# Altium PCB RedBaron v2.PcbDoc
Units mm, origin at the board's own origin, x right, y up, seen from the top; angles counter-clockwise.
Board outline 102 x 85 mm, 4 copper layers (Sig Top, GND Top, GND Bot, Sig Bot), stack 1.586 mm thick; 44 components, 81 nets, 398 pads, 0 vias.
Unrouted connection lines stored in the file: 183.
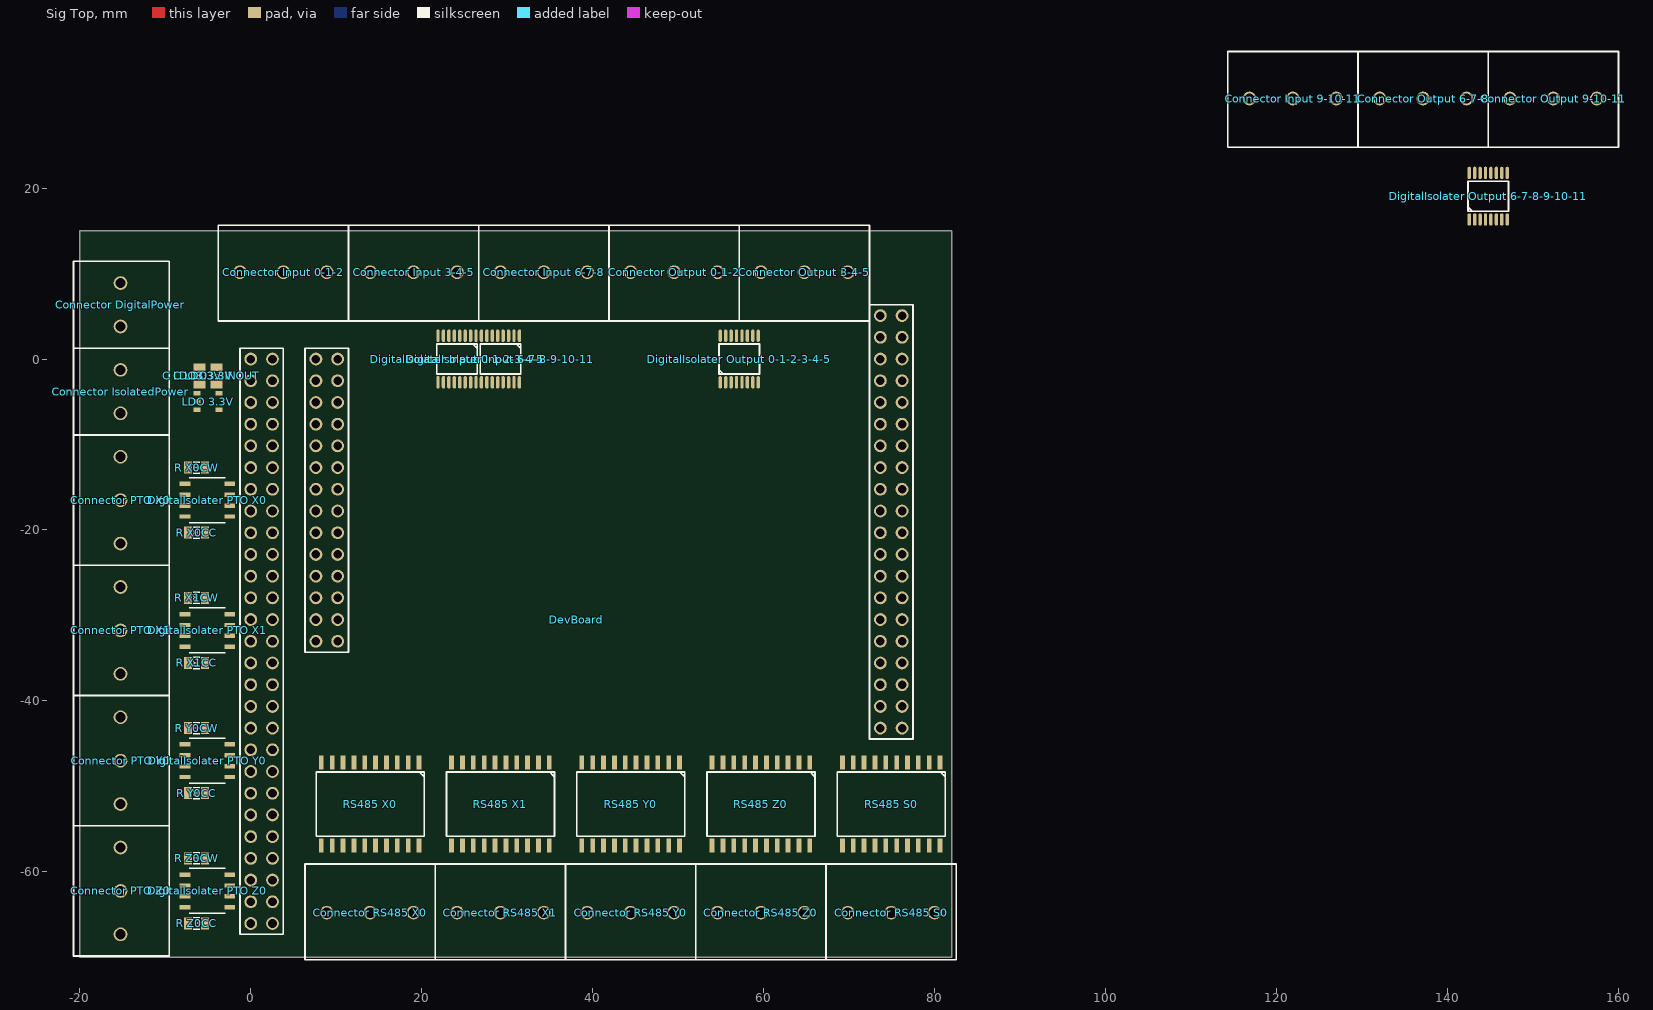
[diagram p0: Sig Top view]
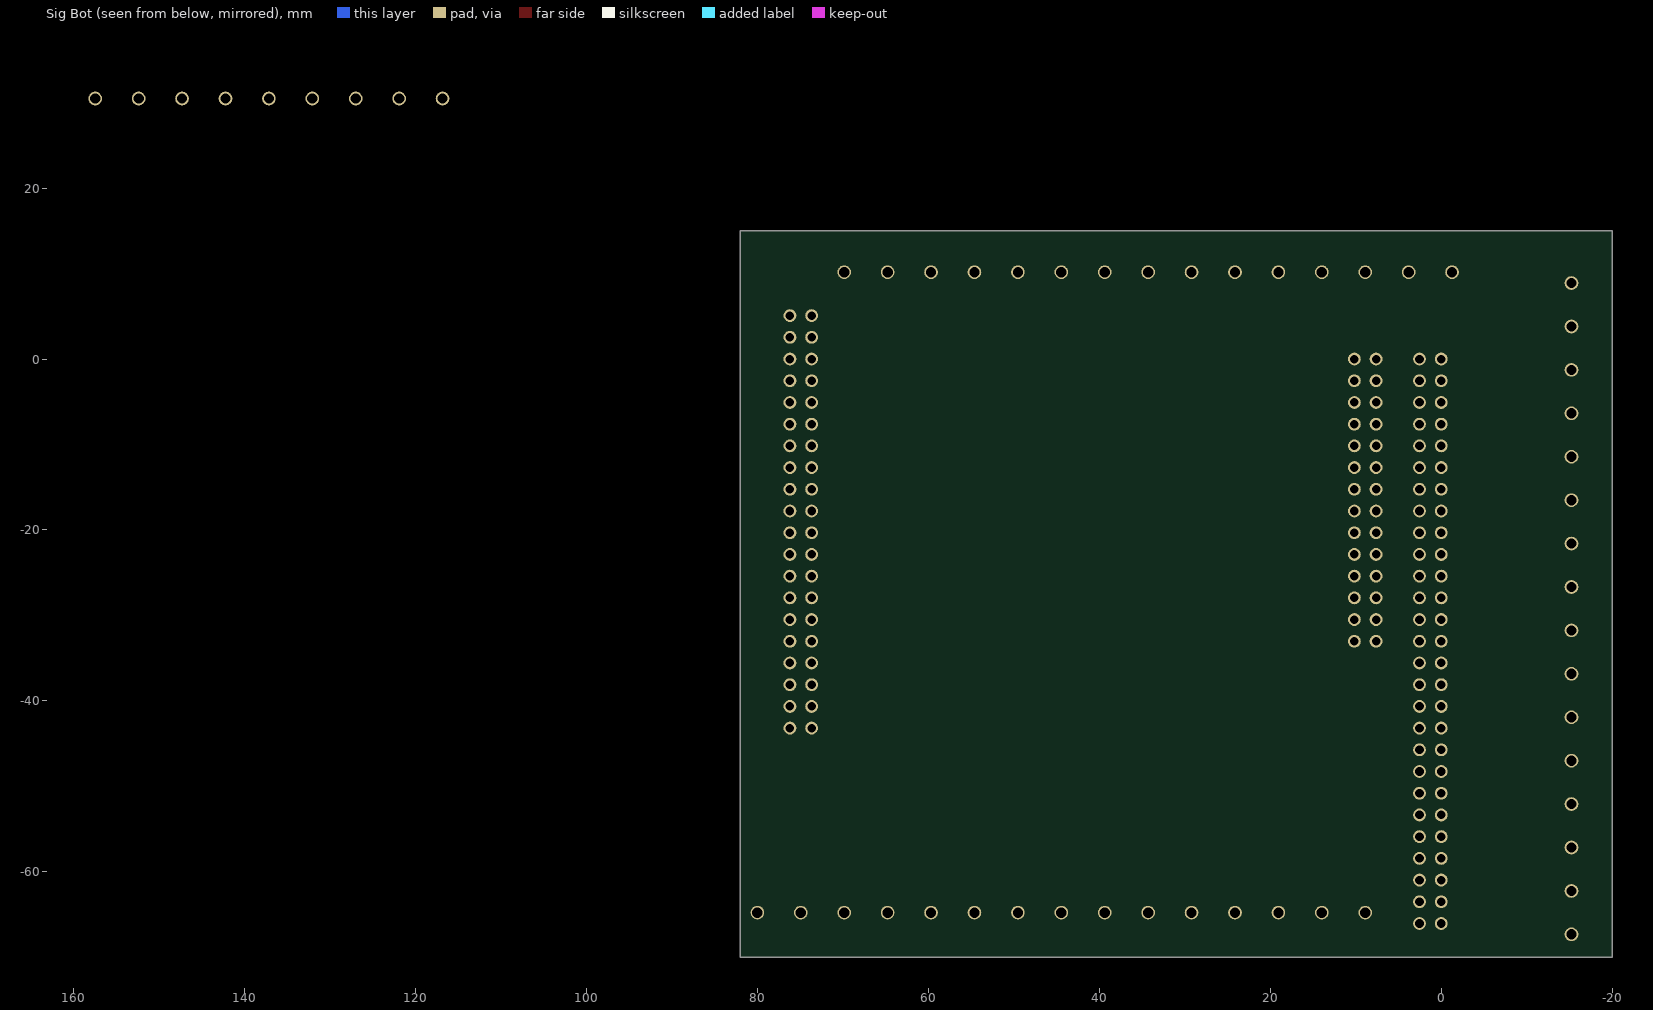
[diagram p1: Sig Bot view, seen from below]

## Layer stack, top to bottom
Top Solder: solder mask 0.03, Solder Resist, Dk 3.8
Sig Top: signal copper 0.035
Prepreg Top: prepreg 0.2104, Prepreg, Dk 4.4
GND Top: signal copper 0.0152
Core Mid: prepreg 1.065, Prepreg, Dk 4.43
GND Bot: signal copper 0.0152
Prepreg Bot: prepreg 0.2104, Prepreg, Dk 4.4
Sig Bot: signal copper 0.035
Bottom Solder: solder mask 0.03, Solder Resist, Dk 3.8

## Board outline
-20,15 82,15 82,-70 -20,-70

## Design rules (kind name [scope] priority, off if disabled: settings)
AssemblyTestPointUsage [All] p1 off:
AssemblyTestpoint [All] p1 off: testpointundercomponent=TRUE minsize=1.016 maxsize=2.54 preferedsize=1.524 minholesize=0 maxholesize=1.016 preferedholesize=0.813 testpointgrid=0.025 usegrid=TRUE gridtolerance=0 allowsidetop=TRUE allowsidebottom=TRUE
BoardOutlineClearance [All] p1 off: gap=0.2 ignorepadtopadclearanceinfootprint=FALSE
Clearance [All] p1: gap=0.15 ignorepadtopadclearanceinfootprint=TRUE except(0.2: Arc-Text Arc-Hole Track-Text Track-Hole SMDPad-SMDPad SMDPad-THPad SMDPad-Text SMDPad-Hole THPad-THPad THPad-Via THPad-Text THPad-Hole Via-Text Via-Hole Fill-Text Fill-Hole Poly-Text Poly-Hole Region-Text Region-Hole Text-Text Text-Hole)
ComponentClearance [All] p1: gap=0 collisioncheckmode=3 verticalgap=2540 showdistances=FALSE
FabricationTestPointUsage [All] p1 off: valid=0 allowmultiple=FALSE
FabricationTestpoint [All] p1 off: side=3 testpointundercomponent=TRUE minsize=1.016 maxsize=2.54 preferedsize=1.524 minholesize=0 maxholesize=1.016 preferedholesize=0.813 testpointgrid=0.025 allowsidetop=TRUE allowsidebottom=TRUE usegrid=TRUE gridtolerance=0
HoleSize [All] p1: absolutevalues=TRUE maxlimit=5 minlimit=0.2 maxpercent=80.000 minpercent=20.000
HoleToHoleClearance [All] p1: gap=0.2 allowstackedmicrovias=TRUE
MinimumAnnularRing [All] p1: minimumring=0.05
MinimumSolderMaskSliver [All] p1 off: minsoldermaskwidth=0.1
NetAntennae [InNet('No Net')] p1: netantennaetolerance=0
PasteMaskExpansion [All] p1: expansion=-0.05
PlaneClearance [All] p1: clearance=0.1
PlaneConnect [All] p1: planeconnectstyle=Direct reliefexpansion=0.1 reliefentries=4 reliefconductorwidth=0.1 reliefairgap=0.1
PolygonConnect [All] p1: connectstyle=Direct reliefconductorwidth=0.1 reliefentries=4 polygonreliefangle="90 Angle" airgapwidth=0.083
RoutingCorners [All] p1: cornerstyle=45-Degree minsetback=2 maxsetback=2
RoutingVias [All] p1: holewidth=0.2 width=0.5 viastyle="Through Hole" minholewidth=0.2 minwidth=0.5 maxholewidth=0.5 maxwidth=1
SilkToSilkClearance [All] p1 off: silktosilkclearance=0.1
SilkToSolderMaskClearance [IsPad] p1 off: minsilkscreentomaskgap=0.15 clearancetoexposedcopper=TRUE
SolderMaskExpansion [All] p1: expansion=0 istentingtop=FALSE
SupplyNets "Schematic Supply Nets_3" [InNet('5V')] p1: voltage=0.000
SupplyNets "Schematic Supply Nets_2" [InNet('3.3V')] p2: voltage=0.000
SupplyNets "Schematic Supply Nets_1" [InNet('I5V')] p3: voltage=0.000
SupplyNets "Schematic Supply Nets" [InNet('IGND')] p4: voltage=0.000
SupplyNets "Schematic Supply Nets_6" [InNet('GND')] p5: voltage=0.000
ViasUnderSMD [All] p1: allowed=TRUE
Width [All] p1: maxlimit=0.5 minlimit=0.15 preferedwidth=0.15
15 further rules are at their usual default settings.

## Components (designator, comment, footprint, x,y, rotation, side; value= is the part's Value field where it differs from the comment)
"C LDO3.3V IN" "47uF" "Capacitor 2012(0805)" -6,-1.97 r270 top
"C LDO3.3V OUT" "47uF" "Capacitor 2012(0805)" -4,-1.97 r270 top
"Connector DigitalPower" "Connector Terminal Screw 5.08mm 2pin" "Terminal Screw 5.08mm 2pin" -15.24,6.35 r90 top
"Connector Input 0-1-2" "Connector Terminal Screw 5.08mm 3pin" "Terminal Screw 5.08mm 3pin" 3.81,10.16 r0 top
"Connector Input 3-4-5" "Connector Terminal Screw 5.08mm 3pin" "Terminal Screw 5.08mm 3pin" 19.05,10.16 r0 top
"Connector Input 6-7-8" "Connector Terminal Screw 5.08mm 3pin" "Terminal Screw 5.08mm 3pin" 34.29,10.16 r0 top
"Connector Input 9-10-11" "Connector Terminal Screw 5.08mm 3pin" "Terminal Screw 5.08mm 3pin" 121.92,30.48 r0 top
"Connector IsolatedPower" "Connector Terminal Screw 5.08mm 2pin" "Terminal Screw 5.08mm 2pin" -15.24,-3.81 r90 top
"Connector Output 0-1-2" "Connector Terminal Screw 5.08mm 3pin" "Terminal Screw 5.08mm 3pin" 49.53,10.16 r0 top
"Connector Output 3-4-5" "Connector Terminal Screw 5.08mm 3pin" "Terminal Screw 5.08mm 3pin" 64.77,10.16 r0 top
"Connector Output 6-7-8" "Connector Terminal Screw 5.08mm 3pin" "Terminal Screw 5.08mm 3pin" 137.16,30.48 r0 top
"Connector Output 9-10-11" "Connector Terminal Screw 5.08mm 3pin" "Terminal Screw 5.08mm 3pin" 152.4,30.48 r0 top
"Connector PTO X0" "Connector Terminal Screw 5.08mm 3pin" "Terminal Screw 5.08mm 3pin" -15.24,-16.51 r90 top
"Connector PTO X1" "Connector Terminal Screw 5.08mm 3pin" "Terminal Screw 5.08mm 3pin" -15.24,-31.75 r90 top
"Connector PTO Y0" "Connector Terminal Screw 5.08mm 3pin" "Terminal Screw 5.08mm 3pin" -15.24,-46.99 r90 top
"Connector PTO Z0" "Connector Terminal Screw 5.08mm 3pin" "Terminal Screw 5.08mm 3pin" -15.24,-62.23 r90 top
"Connector RS485 S0" "Connector Terminal Screw 5.08mm 3pin" "Terminal Screw 5.08mm 3pin" 74.93,-64.77 r180 top
"Connector RS485 X0" "Connector Terminal Screw 5.08mm 3pin" "Terminal Screw 5.08mm 3pin" 13.97,-64.77 r180 top
"Connector RS485 X1" "Connector Terminal Screw 5.08mm 3pin" "Terminal Screw 5.08mm 3pin" 29.21,-64.77 r180 top
"Connector RS485 Y0" "Connector Terminal Screw 5.08mm 3pin" "Terminal Screw 5.08mm 3pin" 44.45,-64.77 r180 top
"Connector RS485 Z0" "Connector Terminal Screw 5.08mm 3pin" "Terminal Screw 5.08mm 3pin" 59.69,-64.77 r180 top
DevBoard "DevBoard SK-AM64xA" "DEVBOARD SKAM64XA" 0,0 r0 top locked
"DigitalIsolater Input 0-1-2-3-4-5" "DigitalIsolater ISO7760" ISO7760DBQ 24.13,0 r270 top
"DigitalIsolater Input 6-7-8-9-10-11" "DigitalIsolater ISO7760" ISO7760DBQ 29.21,0 r270 top
"DigitalIsolater Output 0-1-2-3-4-5" "DigitalIsolater ISO7760" ISO7760DBQ 57.15,0 r90 top
"DigitalIsolater Output 6-7-8-9-10-11" "DigitalIsolater ISO7760" ISO7760DBQ 144.78,19.05 r90 top
"DigitalIsolater PTO X0" "DigitalIsolater ISO6520" ISO6520D -5.08,-16.51 r180 top
"DigitalIsolater PTO X1" "DigitalIsolater ISO6520" ISO6520D -5.08,-31.75 r180 top
"DigitalIsolater PTO Y0" "DigitalIsolater ISO6520" ISO6520D -5.08,-46.99 r180 top
"DigitalIsolater PTO Z0" "DigitalIsolater ISO6520" ISO6520D -5.08,-62.23 r180 top
"LDO 3.3V" "TLV757xxPDBV" TLV757xxPDBV -5,-4.97 r0 top
"R X0CC" "Resistor" "Resistor 2012(0805)" -6.35,-20.32 r180 top
"R X0CW" "Resistor" "Resistor 2012(0805)" -6.35,-12.7 r180 top
"R X1CC" "Resistor" "Resistor 2012(0805)" -6.35,-35.56 r180 top
"R X1CW" "Resistor" "Resistor 2012(0805)" -6.35,-27.94 r180 top
"R Y0CC" "Resistor" "Resistor 2012(0805)" -6.35,-50.8 r180 top
"R Y0CW" "Resistor" "Resistor 2012(0805)" -6.35,-43.18 r180 top
"R Z0CC" "Resistor" "Resistor 2012(0805)" -6.35,-66.04 r0 top
"R Z0CW" "Resistor" "Resistor 2012(0805)" -6.35,-58.42 r180 top
"RS485 S0" "RS485 ISOW1432DFMR" XISOW1432DFMR 74.93,-52.07 r270 top
"RS485 X0" "RS485 ISOW1432DFMR" XISOW1432DFMR 13.97,-52.07 r270 top
"RS485 X1" "RS485 ISOW1432DFMR" XISOW1432DFMR 29.21,-52.07 r270 top
"RS485 Y0" "RS485 ISOW1432DFMR" XISOW1432DFMR 44.45,-52.07 r270 top
"RS485 Z0" "RS485 ISOW1432DFMR" XISOW1432DFMR 59.69,-52.07 r270 top

## Footprints (in the part's own frame and the unit in brackets; to place one, negate y for a bottom-side part, rotate by r counter-clockwise, add the part's x,y. Pads: shape width x height; smd on the part's side, far side on the other; paste and mask are expansions set on the pad)
"Capacitor 2012(0805)" [mm]
  rect 0.9x1.4 smd: 1(-1,0) 2(1,0)
  silkscreen extent -0.4,-0.65 0.4,0.65, body extent -1,-0.63 1,0.63, height 0.82
"DEVBOARD SKAM64XA" [mm]
  round 1.5 hole 1: MCU1(7.62,0) MCU2(10.16,0) MCU3(7.62,-2.54) MCU4(10.16,-2.54) MCU5(7.62,-5.08) MCU6(10.16,-5.08) MCU7(7.62,-7.62) MCU8(10.16,-7.62) MCU9(7.62,-10.16) MCU10(10.16,-10.16) MCU11(7.62,-12.7) MCU12(10.16,-12.7) MCU13(7.62,-15.24) MCU14(10.16,-15.24) MCU15(7.62,-17.78) MCU16(10.16,-17.78) MCU17(7.62,-20.32) MCU18(10.16,-20.32) MCU19(7.62,-22.86) MCU20(10.16,-22.86) MCU21(7.62,-25.4) MCU22(10.16,-25.4) MCU23(7.62,-27.94) MCU24(10.16,-27.94) MCU25(7.62,-30.48) MCU26(10.16,-30.48) MCU27(7.62,-33.02) MCU28(10.16,-33.02) PI1(73.66,5.08) PI2(76.2,5.08) PI3(73.66,2.54) PI4(76.2,2.54) PI5(73.66,0) PI6(76.2,0) PI7(73.66,-2.54) PI8(76.2,-2.54) PI9(73.66,-5.08) PI10(76.2,-5.08) PI11(73.66,-7.62) PI12(76.2,-7.62) PI13(73.66,-10.16) PI14(76.2,-10.16) PI15(73.66,-12.7) PI16(76.2,-12.7) PI17(73.66,-15.24) PI18(76.2,-15.24) PI19(73.66,-17.78) PI20(76.2,-17.78) PI21(73.66,-20.32) PI22(76.2,-20.32) PI23(73.66,-22.86) PI24(76.2,-22.86) PI25(73.66,-25.4) PI26(76.2,-25.4) PI27(73.66,-27.94) PI28(76.2,-27.94) PI29(73.66,-30.48) PI30(76.2,-30.48) PI31(73.66,-33.02) PI32(76.2,-33.02) PI33(73.66,-35.56) PI34(76.2,-35.56) PI35(73.66,-38.1) PI36(76.2,-38.1) PI37(73.66,-40.64) PI38(76.2,-40.64) PI39(73.66,-43.18) PI40(76.2,-43.18) PRU1(0,0) PRU2(2.54,0) PRU3(0,-2.54) PRU4(2.54,-2.54) PRU5(0,-5.08) PRU6(2.54,-5.08) PRU7(0,-7.62) PRU8(2.54,-7.62) PRU9(0,-10.16) PRU10(2.54,-10.16) PRU11(0,-12.7) PRU12(2.54,-12.7) PRU13(0,-15.24) PRU14(2.54,-15.24) PRU15(0,-17.78) PRU16(2.54,-17.78) PRU17(0,-20.32) PRU18(2.54,-20.32) PRU19(0,-22.86) PRU20(2.54,-22.86) PRU21(0,-25.4) PRU22(2.54,-25.4) PRU23(0,-27.94) PRU24(2.54,-27.94) PRU25(0,-30.48) PRU26(2.54,-30.48) PRU27(0,-33.02) PRU28(2.54,-33.02) PRU29(0,-35.56) PRU30(2.54,-35.56) PRU31(0,-38.1) PRU32(2.54,-38.1) PRU33(0,-40.64) PRU34(2.54,-40.64) PRU35(0,-43.18) PRU36(2.54,-43.18) PRU37(0,-45.72) PRU38(2.54,-45.72) PRU39(0,-48.26) PRU40(2.54,-48.26) PRU41(0,-50.8) PRU42(2.54,-50.8) PRU43(0,-53.34) PRU44(2.54,-53.34) PRU45(0,-55.88) PRU46(2.54,-55.88) PRU47(0,-58.42) PRU48(2.54,-58.42) PRU49(0,-60.96) PRU50(2.54,-60.96) PRU51(0,-63.5) PRU52(2.54,-63.5) PRU53(0,-66.04) PRU54(2.54,-66.04)
  silkscreen extent -1.27,-67.31 77.47,6.35, body extent -29.5,-74.73 100.5,14.5, height 7.6
ISO6520D [mil]
  rect 49.41x20 smd paste+0 mask+0: 1(-103.2,75) 2(-103.2,25) 3(-103.2,-25) 4(-103.2,-75) 5(103.2,-75) 6(103.2,-25) 7(103.2,25) 8(103.2,75)
  silkscreen extent -84,-104 84,104, body extent -122,-99 122,99, height 69
ISO7760DBQ [mm]
  oval 1.45x0.4 smd paste+0 mask+0: 1(-2.725,2.222) 2(-2.725,1.587) 3(-2.725,0.952) 4(-2.725,0.317) 5(-2.725,-0.318) 6(-2.725,-0.953) 7(-2.725,-1.588) 8(-2.725,-2.223) 9(2.725,-2.222) 10(2.725,-1.587) 11(2.725,-0.952) 12(2.725,-0.317) 13(2.725,0.318) 14(2.725,0.953) 15(2.725,1.588) 16(2.725,2.223)
  silkscreen extent -1.75,-2.37 1.75,2.37, body extent -3.01,-2.45 3.01,2.45, height 1.62
"Resistor 2012(0805)" [mm]
  rect 0.9x1.4 smd: 1(-1,0) 2(1,0)
  silkscreen extent -0.4,-0.65 0.4,0.65, body extent -1,-0.63 1,0.63, height 0.5
"Terminal Screw 5.08mm 2pin" [mm]
  round 1.6 hole 1.2: 1(-2.54,0) 2(2.54,0)
  silkscreen extent -5.08,-5.7 5.08,5.5, body extent -5.08,-5.7 5.63,5.5, height 18
"Terminal Screw 5.08mm 3pin" [mm]
  round 1.6 hole 1.2: 1(-5.08,0) 2(0,0) 3(5.08,0)
  silkscreen extent -7.62,-5.7 7.62,5.5, body extent -7.62,-5.7 8.17,5.5, height 18
TLV757xxPDBV [mm]
  rect 0.8x0.55 smd paste+0 mask+0: 1(-1.275,0.95) 2(-1.275,0) 3(-1.275,-0.95) 4(1.275,-0.95) 5(1.275,0.95)
  body extent -1.4,-1.45 1.4,1.45, height 1.2
XISOW1432DFMR [mil]
  rect 64.56x21.97 smd paste+0 mask+0: 1(-191,225) 2(-191,175) 3(-191,125) 4(-191,75) 5(-191,25) 6(-191,-25) 7(-191,-75) 8(-191,-125) 9(-191,-175) 10(-191,-225) 11(191,-225) 12(191,-175) 13(191,-125) 14(191,-75) 15(191,-25) 16(191,25) 17(191,75) 18(191,125) 19(191,175) 20(191,225)
  silkscreen extent -148,-249 148,249, body extent -203,-253 203,253, height 133

## Part data
"C LDO3.3V IN" "C LDO3.3V OUT": library part Capacitor, "Capacitor"
"Connector DigitalPower" "Connector Input 0-1-2" "Connector Input 3-4-5" "Connector Input 6-7-8" "Connector Input 9-10-11" "Connector IsolatedPower" "Connector Output 0-1-2" "Connector Output 3-4-5" "Connector Output 6-7-8" "Connector Output 9-10-11" "Connector PTO X0" "Connector PTO X1" "Connector PTO Y0" "Connector PTO Z0" "Connector RS485 S0" "Connector RS485 X0" "Connector RS485 X1" "Connector RS485 Y0" "Connector RS485 Z0": "Terminal Screw 5.08mm", Package=SCREWTERMINAL1X2, DeviceSetName=TERMINALBLOCK-1X2, GateName_1=G$1, LibraryName=TOTUDU, SymbolName_1=TERMINALBLOCK1X2
"DigitalIsolater Input 0-1-2-3-4-5" "DigitalIsolater Input 6-7-8-9-10-11" "DigitalIsolater Output 0-1-2-3-4-5" "DigitalIsolater Output 6-7-8-9-10-11": "6 Channel Digital Isolator", MANUFACTURER_NAME="Texas Instruments", MANUFACTURER_PART_NUMBER=ISO7760DBQ, Copyright="Copyright (C) 2025 Ultra Librarian. All rights reserved.", Datasheet=https://www.ti.com/lit/gpn/iso7760, RefDes=RefDes, Type=TYPE
"DigitalIsolater PTO X0" "DigitalIsolater PTO X1" "DigitalIsolater PTO Y0" "DigitalIsolater PTO Z0": "2 Channel Digital Isolator", Datasheet=https://www.ti.com/lit/gpn/iso7760, Price="Rs. 114"
"LDO 3.3V": library part "LDO TLV757xxPDBV", "LDO 1A", MANUFACTURER_NAME="Texas Instruments", MANUFACTURER_PART_NUMBER=TLV75709PDRVR, Datasheet=https://www.ti.com/lit/gpn/tlv757p, Price="Rs. 34"
"RS485 S0" "RS485 X0" "RS485 X1" "RS485 Y0" "RS485 Z0": "Isolated RS485 With Integrated Isolated Power", MANUFACTURER_NAME="Texas Instruments", MANUFACTURER_PART_NUMBER=XISOW1432DFMR, Copyright="Copyright (C) 2025 Ultra Librarian. All rights reserved.", Datasheet=https://www.ti.com/lit/gpn/isow1432, RefDes=RefDes, Type=Type

## Nets (pads, with @x,y where several pads share a name; then routed paths per layer and width w, separated by ;. In a path a pad name is that pad's centre, name@x,y a point inside that pad or via, vN(x,y) a via of type N, cw(c..) or ccw(c..) an arc to the next point about the centre after c; other vN are vias at no path point)
3.3V: "C LDO3.3V OUT.2" "DigitalIsolater Input 0-1-2-3-4-5.16" "DigitalIsolater Input 6-7-8-9-10-11.16" "DigitalIsolater Output 0-1-2-3-4-5.1" "DigitalIsolater Output 6-7-8-9-10-11.1" "DigitalIsolater PTO X0.1" "DigitalIsolater PTO X1.1" "DigitalIsolater PTO Y0.1" "DigitalIsolater PTO Z0.1" "LDO 3.3V.5" "RS485 S0.1" "RS485 X0.1" "RS485 X1.1" "RS485 Y0.1" "RS485 Z0.1"
5V: "C LDO3.3V IN.2" "Connector DigitalPower.2" "LDO 3.3V.1" "RS485 S0.9" "RS485 X0.9" "RS485 X1.9" "RS485 Y0.9" "RS485 Z0.9"
Enable: "LDO 3.3V.3"
GND: "C LDO3.3V IN.1" "C LDO3.3V OUT.1" "Connector DigitalPower.1" "DigitalIsolater Input 0-1-2-3-4-5.9" "DigitalIsolater Input 6-7-8-9-10-11.9" "DigitalIsolater Output 0-1-2-3-4-5.8" "DigitalIsolater Output 6-7-8-9-10-11.8" "DigitalIsolater PTO X0.4" "DigitalIsolater PTO X1.4" "DigitalIsolater PTO Y0.4" "DigitalIsolater PTO Z0.4" "LDO 3.3V.2" "RS485 S0.6" "RS485 S0.10" "RS485 X0.6" "RS485 X0.10" "RS485 X1.6" "RS485 X1.10" "RS485 Y0.6" "RS485 Y0.10" "RS485 Z0.6" "RS485 Z0.10" DevBoard.MCU2 DevBoard.MCU7 DevBoard.MCU15 DevBoard.MCU20 DevBoard.MCU27 DevBoard.PI6 DevBoard.PI9 DevBoard.PI14 DevBoard.PI20 DevBoard.PI25 DevBoard.PI30 DevBoard.PI34 DevBoard.PRU11 DevBoard.PRU18 DevBoard.PRU23 DevBoard.PRU30 DevBoard.PRU35 DevBoard.PRU37 DevBoard.PRU39 DevBoard.PRU42 DevBoard.PRU47
I5V: "Connector IsolatedPower.2" "DigitalIsolater Input 0-1-2-3-4-5.1" "DigitalIsolater Input 6-7-8-9-10-11.1" "DigitalIsolater Output 0-1-2-3-4-5.16" "DigitalIsolater Output 6-7-8-9-10-11.16" "DigitalIsolater PTO X0.8" "DigitalIsolater PTO X1.8" "DigitalIsolater PTO Y0.8" "DigitalIsolater PTO Z0.8"
IGND: "Connector IsolatedPower.1" "Connector PTO X0.2" "Connector PTO X1.2" "Connector PTO Y0.2" "Connector PTO Z0.2" "Connector RS485 S0.3" "Connector RS485 X0.3" "Connector RS485 X1.3" "Connector RS485 Y0.3" "Connector RS485 Z0.3" "DigitalIsolater Input 0-1-2-3-4-5.8" "DigitalIsolater Input 6-7-8-9-10-11.8" "DigitalIsolater Output 0-1-2-3-4-5.9" "DigitalIsolater Output 6-7-8-9-10-11.9" "DigitalIsolater PTO X0.5" "DigitalIsolater PTO X1.5" "DigitalIsolater PTO Y0.5" "DigitalIsolater PTO Z0.5" "RS485 S0.11" "RS485 S0.15" "RS485 X0.11" "RS485 X0.15" "RS485 X1.11" "RS485 X1.15" "RS485 Y0.11" "RS485 Y0.15" "RS485 Z0.11" "RS485 Z0.15"
"NetConnector Input 0-1-2_1": "Connector Input 0-1-2.1" "DigitalIsolater Input 0-1-2-3-4-5.7"
"NetConnector Input 0-1-2_2": "Connector Input 0-1-2.2" "DigitalIsolater Input 0-1-2-3-4-5.6"
"NetConnector Input 0-1-2_3": "Connector Input 0-1-2.3" "DigitalIsolater Input 0-1-2-3-4-5.5"
"NetConnector Input 3-4-5_1": "Connector Input 3-4-5.1" "DigitalIsolater Input 0-1-2-3-4-5.4"
"NetConnector Input 3-4-5_2": "Connector Input 3-4-5.2" "DigitalIsolater Input 0-1-2-3-4-5.3"
"NetConnector Input 3-4-5_3": "Connector Input 3-4-5.3" "DigitalIsolater Input 0-1-2-3-4-5.2"
"NetConnector Input 6-7-8_1": "Connector Input 6-7-8.1" "DigitalIsolater Input 6-7-8-9-10-11.7"
"NetConnector Input 6-7-8_2": "Connector Input 6-7-8.2" "DigitalIsolater Input 6-7-8-9-10-11.6"
"NetConnector Input 6-7-8_3": "Connector Input 6-7-8.3" "DigitalIsolater Input 6-7-8-9-10-11.5"
"NetConnector Output 0-1-2_1": "Connector Output 0-1-2.1" "DigitalIsolater Output 0-1-2-3-4-5.15"
"NetConnector Output 0-1-2_2": "Connector Output 0-1-2.2" "DigitalIsolater Output 0-1-2-3-4-5.14"
"NetConnector Output 0-1-2_3": "Connector Output 0-1-2.3" "DigitalIsolater Output 0-1-2-3-4-5.13"
"NetConnector Output 3-4-5_1": "Connector Output 3-4-5.1" "DigitalIsolater Output 0-1-2-3-4-5.12"
"NetConnector Output 3-4-5_2": "Connector Output 3-4-5.2" "DigitalIsolater Output 0-1-2-3-4-5.11"
"NetConnector Output 3-4-5_3": "Connector Output 3-4-5.3" "DigitalIsolater Output 0-1-2-3-4-5.10"
"NetConnector Output 6-7-8_1": "Connector Output 6-7-8.1" "DigitalIsolater Output 6-7-8-9-10-11.15"
"NetConnector Output 6-7-8_2": "Connector Output 6-7-8.2" "DigitalIsolater Output 6-7-8-9-10-11.14"
"NetConnector Output 6-7-8_3": "Connector Output 6-7-8.3" "DigitalIsolater Output 6-7-8-9-10-11.13"
"NetConnector Output 9-10-11_1": "Connector Output 9-10-11.1" "DigitalIsolater Output 6-7-8-9-10-11.12"
"NetConnector Output 9-10-11_2": "Connector Output 9-10-11.2" "DigitalIsolater Output 6-7-8-9-10-11.11"
"NetConnector Output 9-10-11_3": "Connector Output 9-10-11.3" "DigitalIsolater Output 6-7-8-9-10-11.10"
"NetConnector RS485 S0_1": "Connector RS485 S0.1" "RS485 S0.18" "RS485 S0.19"
"NetConnector RS485 S0_2": "Connector RS485 S0.2" "RS485 S0.17" "RS485 S0.20"
"NetConnector RS485 X0_1": "Connector RS485 X0.1" "RS485 X0.18" "RS485 X0.19"
"NetConnector RS485 X0_2": "Connector RS485 X0.2" "RS485 X0.17" "RS485 X0.20"
"NetConnector RS485 X1_1": "Connector RS485 X1.1" "RS485 X1.18" "RS485 X1.19"
"NetConnector RS485 X1_2": "Connector RS485 X1.2" "RS485 X1.17" "RS485 X1.20"
"NetConnector RS485 Y0_1": "Connector RS485 Y0.1" "RS485 Y0.18" "RS485 Y0.19"
"NetConnector RS485 Y0_2": "Connector RS485 Y0.2" "RS485 Y0.17" "RS485 Y0.20"
"NetConnector RS485 Z0_1": "Connector RS485 Z0.1" "RS485 Z0.18" "RS485 Z0.19"
"NetConnector RS485 Z0_2": "Connector RS485 Z0.2" "RS485 Z0.17" "RS485 Z0.20"
"NetRS485 S0_12": "RS485 S0.12" "RS485 S0.13" "RS485 S0.16"
"NetRS485 X0_12": "RS485 X0.12" "RS485 X0.13" "RS485 X0.16"
"NetRS485 X1_12": "RS485 X1.12" "RS485 X1.13" "RS485 X1.16"
"NetRS485 Y0_12": "RS485 Y0.12" "RS485 Y0.13" "RS485 Y0.16"
"NetRS485 Z0_12": "RS485 Z0.12" "RS485 Z0.13" "RS485 Z0.16"
S0F: DevBoard.PRU16
S0RX: "RS485 S0.4" DevBoard.PI26
S0TX: "RS485 S0.2" DevBoard.PI11
X0CC: "DigitalIsolater PTO X0.2" DevBoard.PRU13
X0CC*: "DigitalIsolater PTO X0.7" "R X0CC.1"
X0CC+: "Connector PTO X0.1" "R X0CC.2"
X0CW: "DigitalIsolater PTO X0.3" DevBoard.PRU5
X0CW*: "DigitalIsolater PTO X0.6" "R X0CW.1"
X0CW+: "Connector PTO X0.3" "R X0CW.2"
X0F: DevBoard.PRU15
X0RX: "RS485 X0.4" DevBoard.PRU31
X0TX: "RS485 X0.2" DevBoard.PRU20
X1CC: "DigitalIsolater PTO X1.2" DevBoard.PRU28
X1CC*: "DigitalIsolater PTO X1.7" "R X1CC.1"
X1CC+: "Connector PTO X1.1" "R X1CC.2"
X1CW: "DigitalIsolater PTO X1.3" DevBoard.PRU21
X1CW*: "DigitalIsolater PTO X1.6" "R X1CW.1"
X1CW+: "Connector PTO X1.3" "R X1CW.2"
X1F: DevBoard.PRU19
X1RX: "RS485 X1.4" DevBoard.PRU53
X1TX: "RS485 X1.2" DevBoard.PRU48
Y0CC: "DigitalIsolater PTO Y0.2" DevBoard.PRU38
Y0CC*: "DigitalIsolater PTO Y0.7" "R Y0CC.1"
Y0CC+: "Connector PTO Y0.1" "R Y0CC.2"
Y0CW: "DigitalIsolater PTO Y0.3" DevBoard.PRU36
Y0CW*: "DigitalIsolater PTO Y0.6" "R Y0CW.1"
Y0CW+: "Connector PTO Y0.3" "R Y0CW.2"
Y0F: DevBoard.PRU14
Y0RX: "RS485 Y0.4" DevBoard.PRU50
Y0TX: "RS485 Y0.2" DevBoard.PRU12
Z0CC: "DigitalIsolater PTO Z0.2" DevBoard.PRU49
Z0CC*: "DigitalIsolater PTO Z0.7" "R Z0CC.1"
Z0CC+: "Connector PTO Z0.1" "R Z0CC.2"
Z0CW: "DigitalIsolater PTO Z0.3" DevBoard.PRU45
Z0CW*: "DigitalIsolater PTO Z0.6" "R Z0CW.1"
Z0CW+: "Connector PTO Z0.3" "R Z0CW.2"
Z0F: DevBoard.PRU3
Z0RX: "RS485 Z0.4" DevBoard.PI8
Z0TX: "RS485 Z0.2" DevBoard.PI10
pads on no net: "Connector Input 9-10-11.1" "Connector Input 9-10-11.2" "Connector Input 9-10-11.3" "DigitalIsolater Input 0-1-2-3-4-5.10" "DigitalIsolater Input 0-1-2-3-4-5.11" "DigitalIsolater Input 0-1-2-3-4-5.12" "DigitalIsolater Input 0-1-2-3-4-5.13" "DigitalIsolater Input 0-1-2-3-4-5.14" "DigitalIsolater Input 0-1-2-3-4-5.15" "DigitalIsolater Input 6-7-8-9-10-11.2" "DigitalIsolater Input 6-7-8-9-10-11.3" "DigitalIsolater Input 6-7-8-9-10-11.4" "DigitalIsolater Input 6-7-8-9-10-11.10" "DigitalIsolater Input 6-7-8-9-10-11.11" "DigitalIsolater Input 6-7-8-9-10-11.12" "DigitalIsolater Input 6-7-8-9-10-11.13" "DigitalIsolater Input 6-7-8-9-10-11.14" "DigitalIsolater Input 6-7-8-9-10-11.15" "DigitalIsolater Output 0-1-2-3-4-5.2" "DigitalIsolater Output 0-1-2-3-4-5.3" "DigitalIsolater Output 0-1-2-3-4-5.4" "DigitalIsolater Output 0-1-2-3-4-5.5" "DigitalIsolater Output 0-1-2-3-4-5.6" "DigitalIsolater Output 0-1-2-3-4-5.7" "DigitalIsolater Output 6-7-8-9-10-11.2" "DigitalIsolater Output 6-7-8-9-10-11.3" "DigitalIsolater Output 6-7-8-9-10-11.4" "DigitalIsolater Output 6-7-8-9-10-11.5" "DigitalIsolater Output 6-7-8-9-10-11.6" "DigitalIsolater Output 6-7-8-9-10-11.7" "LDO 3.3V.4" "RS485 S0.3" "RS485 S0.5" "RS485 S0.7" "RS485 S0.8" "RS485 S0.14" "RS485 X0.3" "RS485 X0.5" "RS485 X0.7" "RS485 X0.8" "RS485 X0.14" "RS485 X1.3" "RS485 X1.5" "RS485 X1.7" "RS485 X1.8" "RS485 X1.14" "RS485 Y0.3" "RS485 Y0.5" "RS485 Y0.7" "RS485 Y0.8" "RS485 Y0.14" "RS485 Z0.3" "RS485 Z0.5" "RS485 Z0.7" "RS485 Z0.8" "RS485 Z0.14" DevBoard.MCU1 DevBoard.MCU3 DevBoard.MCU4 DevBoard.MCU5 DevBoard.MCU6 DevBoard.MCU8 DevBoard.MCU9 DevBoard.MCU10 DevBoard.MCU11 DevBoard.MCU12 DevBoard.MCU13 DevBoard.MCU14 DevBoard.MCU16 DevBoard.MCU17 DevBoard.MCU18 DevBoard.MCU19 DevBoard.MCU21 DevBoard.MCU22 DevBoard.MCU23 DevBoard.MCU24 DevBoard.MCU25 DevBoard.MCU26 DevBoard.MCU28 DevBoard.PI1 DevBoard.PI2 DevBoard.PI3 DevBoard.PI4 DevBoard.PI5 DevBoard.PI7 DevBoard.PI12 DevBoard.PI13 DevBoard.PI15 DevBoard.PI16 DevBoard.PI17 DevBoard.PI18 DevBoard.PI19 DevBoard.PI21 DevBoard.PI22 DevBoard.PI23 DevBoard.PI24 DevBoard.PI27 DevBoard.PI28 DevBoard.PI29 DevBoard.PI31 DevBoard.PI32 DevBoard.PI33 DevBoard.PI35 DevBoard.PI36 DevBoard.PI37 DevBoard.PI38 DevBoard.PI39 DevBoard.PI40 DevBoard.PRU1 DevBoard.PRU2 DevBoard.PRU4 DevBoard.PRU6 DevBoard.PRU7 DevBoard.PRU8 DevBoard.PRU9 DevBoard.PRU10 DevBoard.PRU17 DevBoard.PRU22 DevBoard.PRU24 DevBoard.PRU25 DevBoard.PRU26 DevBoard.PRU27 DevBoard.PRU29 DevBoard.PRU32 DevBoard.PRU33 DevBoard.PRU34 DevBoard.PRU40 DevBoard.PRU41 DevBoard.PRU43 DevBoard.PRU44 DevBoard.PRU46 DevBoard.PRU51 DevBoard.PRU52 DevBoard.PRU54

## Text inside footprints (layer, text, board x,y; h text height)
"C LDO3.3V IN": Top Overlay "C" at -6.4,-1.703 h0.8 r270
"C LDO3.3V OUT": Top Overlay "C" at -4.4,-1.703 h0.8 r270
"DigitalIsolater PTO X0": Mechanical 13 "*" at -3.15,-17.666 h1.27 r180
"DigitalIsolater PTO X1": Mechanical 13 "*" at -3.15,-32.906 h1.27 r180
"DigitalIsolater PTO Y0": Mechanical 13 "*" at -3.15,-48.146 h1.27 r180
"DigitalIsolater PTO Z0": Mechanical 13 "*" at -3.15,-63.386 h1.27 r180
"R X0CC": Top Overlay "R" at -6.083,-19.92 h0.8 r180
"R X0CW": Top Overlay "R" at -6.083,-12.3 h0.8 r180
"R X1CC": Top Overlay "R" at -6.083,-35.16 h0.8 r180
"R X1CW": Top Overlay "R" at -6.083,-27.54 h0.8 r180
"R Y0CC": Top Overlay "R" at -6.083,-50.4 h0.8 r180
"R Y0CW": Top Overlay "R" at -6.083,-42.78 h0.8 r180
"R Z0CC": Top Overlay "R" at -6.617,-66.44 h0.8
"R Z0CW": Top Overlay "R" at -6.083,-58.02 h0.8 r180
"RS485 S0": Mechanical 13 "*" at 80.048,-48.336 h1.27 r270; Mechanical 13 "RefDes2" at 74.295,-49.847 h1.27 r270
"RS485 X0": Mechanical 13 "RefDes2" at 13.335,-49.847 h1.27 r270; Mechanical 13 "*" at 19.088,-48.336 h1.27 r270
"RS485 X1": Mechanical 13 "*" at 34.328,-48.336 h1.27 r270; Mechanical 13 "RefDes2" at 28.575,-49.847 h1.27 r270
"RS485 Y0": Mechanical 13 "RefDes2" at 43.815,-49.847 h1.27 r270; Mechanical 13 "*" at 49.568,-48.336 h1.27 r270
"RS485 Z0": Mechanical 13 "*" at 64.808,-48.336 h1.27 r270; Mechanical 13 "RefDes2" at 59.055,-49.847 h1.27 r270